# EAGLE board SHIELD_TEST_INPUT_v2 (EAGLE 9.6.2)
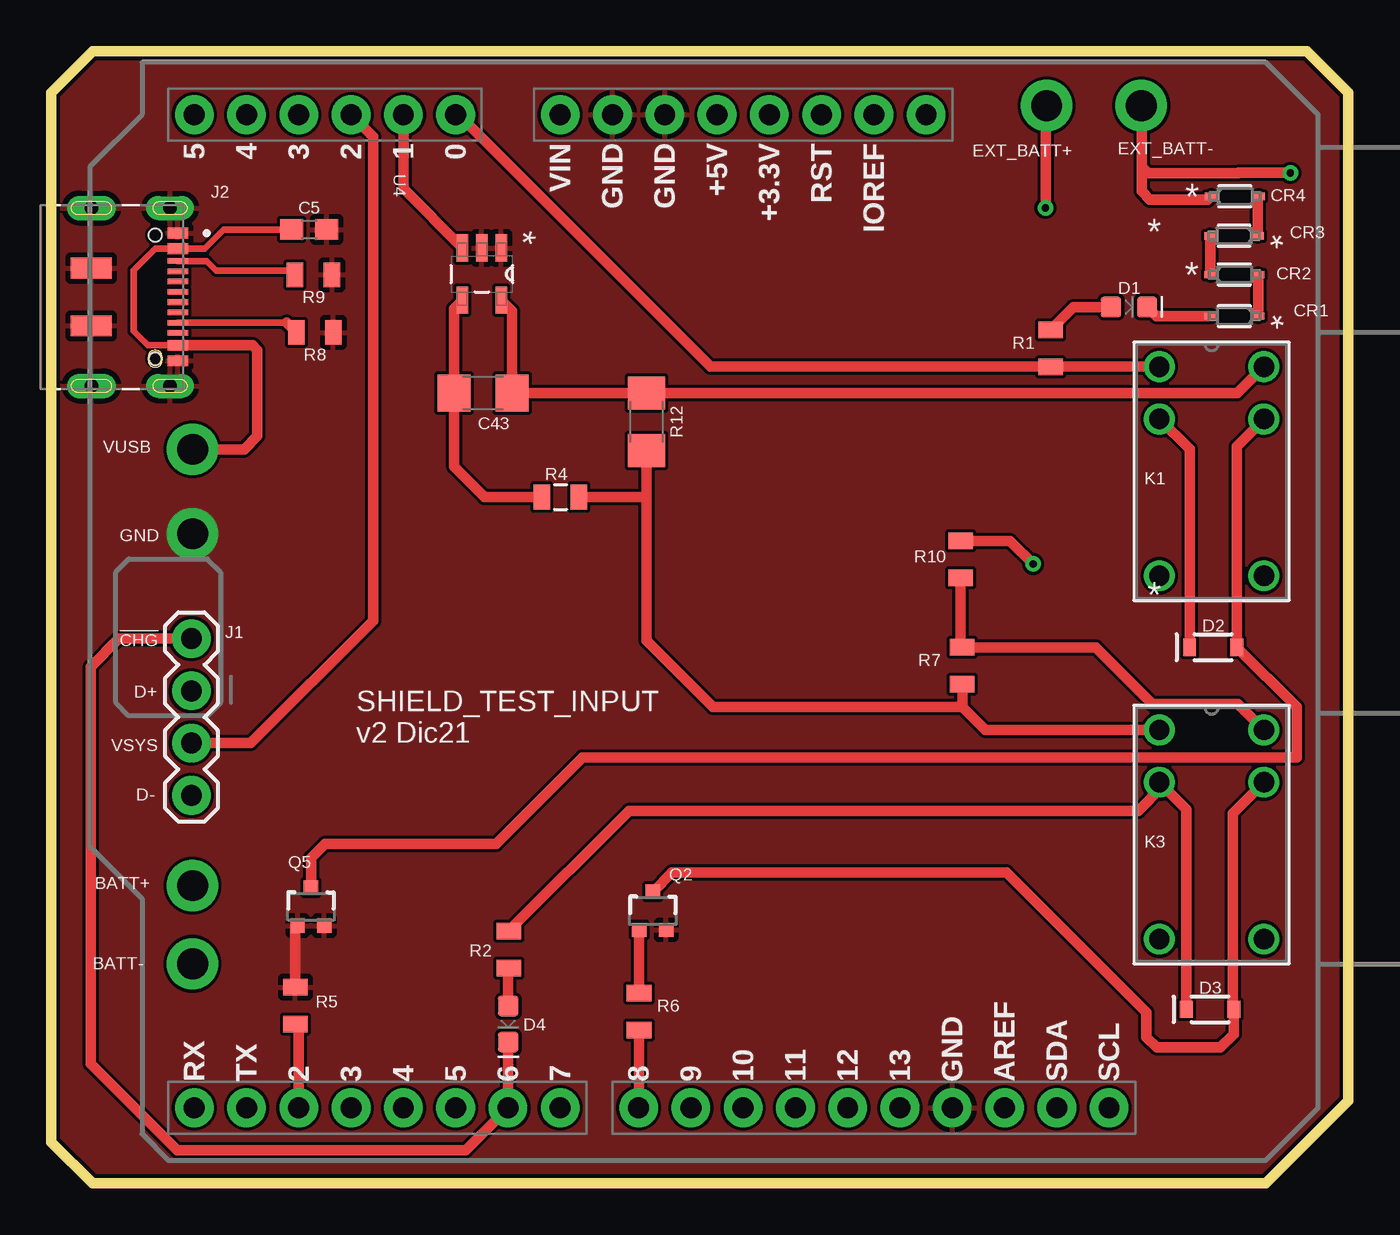
[diagram p0: board, top side]
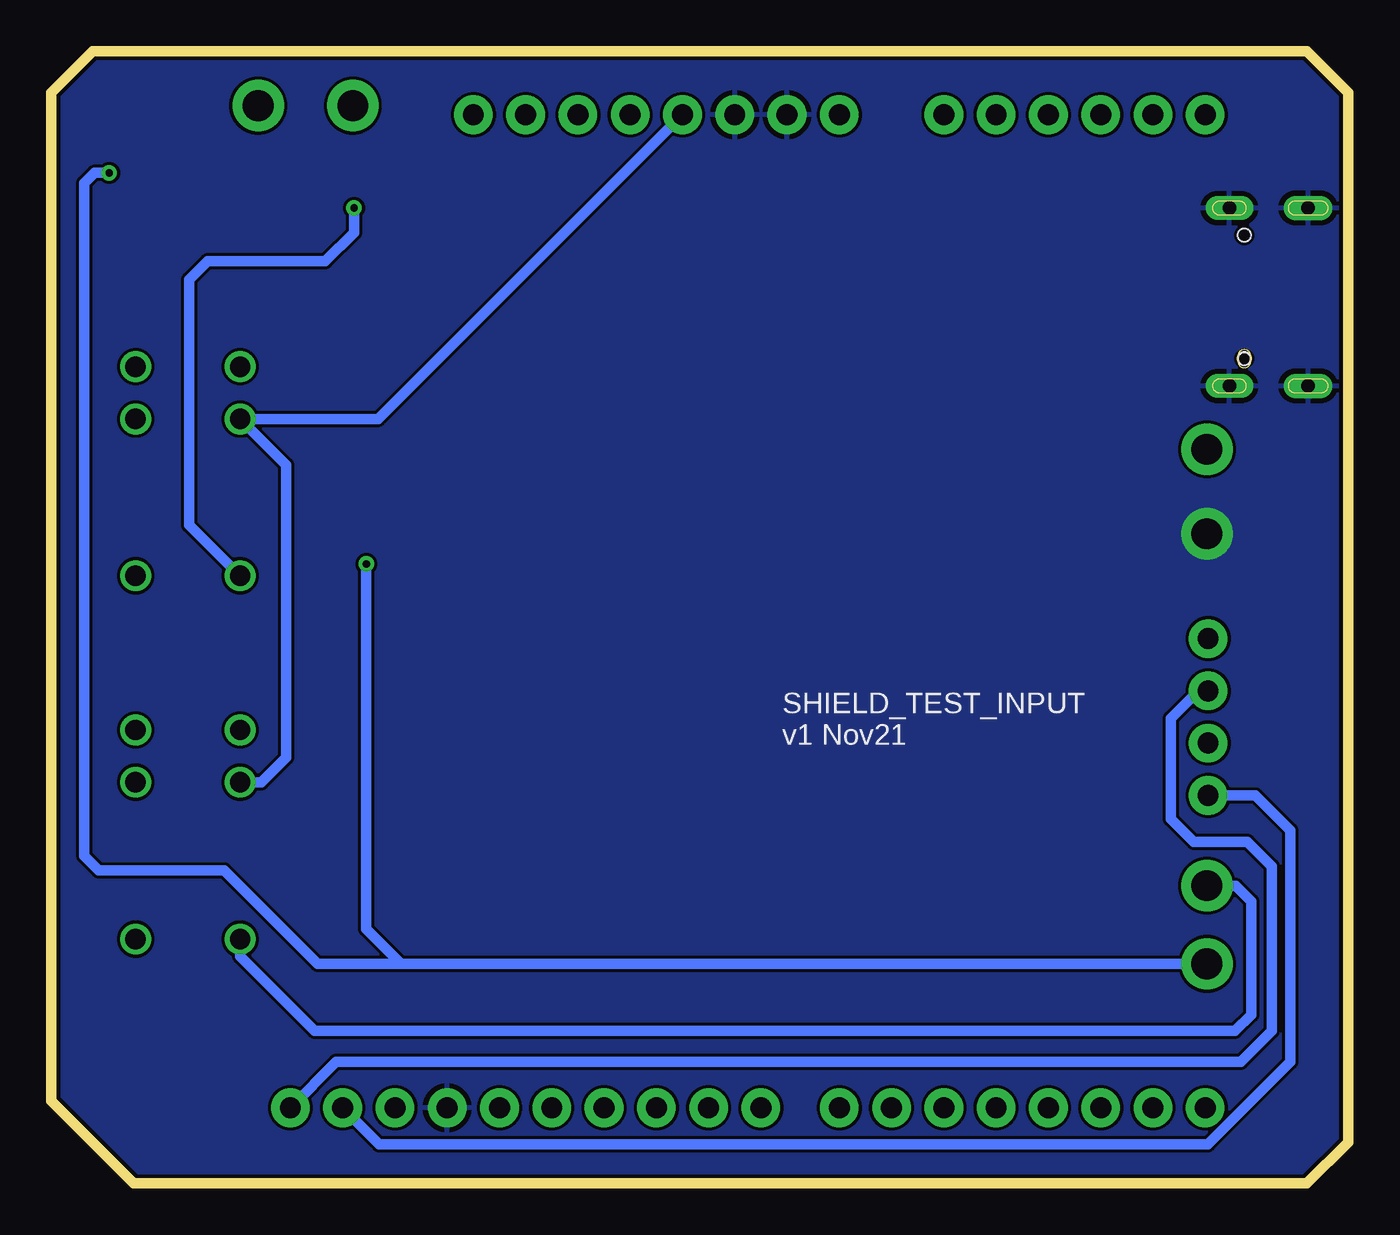
[diagram p1: board, bottom side, seen from below]

Size 63 x 55 mm. Coordinates in mm from the lower left corner, seen from the top.
Outline: 2,55 61,55 63,53 63,4 59,0 2,0 0,2 0,53 2,55
Copper layers (1*16): Top 0.035mm / dielectric 1.5mm / Bottom 0.035mm
Design rules "default *": minimum track width 6mil, minimum drill 0.35mm, track to track 6mil, track to pad 6mil, pad to pad 6mil, via to via 6mil, smd to smd 6mil, copper to edge 7mil, drill to drill 6mil, minimum pad ring 10mil, minimum via ring 8mil, stop-mask expansion 4mil, vias tented up to drill 0mil, thermal gap 10mil

## Footprints (pad centres in the part's own frame; a part is rotated, then mirrored left to right if it is on the bottom)
UNO_R3_SHIELD = drill 1.016 pad 1.88: 3.3V 24.13,-2.54; 5V 24.13,0; A0 24.13,12.7; A1 24.13,15.24; A2 24.13,17.78; A3 24.13,20.32; A4 24.13,22.86; A5 24.13,25.4; AREF -24.13,-13.97; D2 -24.13,20.32; D3 -24.13,17.78; D4 -24.13,15.24; D5 -24.13,12.7; D6 -24.13,10.16; D7 -24.13,7.62; D8 -24.13,3.81; D9 -24.13,1.27; D10 -24.13,-1.27; D11 -24.13,-3.81; D12 -24.13,-6.35; D13 -24.13,-8.89; GND@0 24.13,2.54; GND@1 24.13,5.08; GND@2 -24.13,-11.43; IOREF 24.13,-7.62; NC 24.13,-10.16; RES 24.13,-5.08; RX -24.13,25.4; SCL -24.13,-19.05; SDA -24.13,-16.51; TX -24.13,22.86; VIN 24.13,7.62
PAD.02X.02 = smd 0.508 x 0.508: P$1 0,0
0603 = smd 1.1 x 1: 1 -0.85,0; 2 0.85,0
1206 = smd 1.6 x 1.8: 1 -1.4,0; 2 1.4,0
SOD323F_DIO = smd 0.603 x 0.35: 1 -1.152,0; 2 1.152,0
LED-0603 = smd 1 x 1: A -0.877,0; C 0.877,0
SOD-323 = smd 0.63 x 0.83: A 1.15,0; C -1.15,0
1X04 = drill 1.016 pad 1.88: 1 0,0; 2 2.54,0; 3 5.08,0; 4 7.62,0
JAE_DX07S016JA1R1500 = smd 0.52 x 1: 1 -3.1,1.1; 2 -2.35,1.1; 11 2.35,1.1; 12 3.1,1.1 | smd 0.27 x 1: 3 -1.75,1.1; 4 -1.25,1.1; 5 -0.75,1.1; 6 -0.25,1.1; 7 0.25,1.1; 8 0.75,1.1; 9 1.25,1.1; 10 1.75,1.1 | smd 1 x 2: S1 -1.4,-3.1; S2 1.4,-3.1 | drill 0.65 long: S3 -4.32,0.725; S4 4.32,0.725 | drill 0.65 pad 1.2 long: S5 -4.32,-3.1; S6 4.32,-3.1 | hole 0.6: 3,0 | hole 0.63: 3,0; -3,0
RELAY_G5V-1_OMR = drill 0.991 pad 1.499: 1 -5.08,10.16; 2 -5.08,7.62; 5 -5.08,0; 6 0,0; 9 0,7.62; 10 0,10.16
SOT323 = smd 0.7 x 0.7: 1 -0.65,-0.925; 2 0.65,-0.925; 3 0,0.925
0805 = smd 0.8 x 1.2: 1 -0.9,0; 2 0.9,0
SOT95P280X145-5N = smd 1.321 x 0.559: 1 -1.27,0.94; 2 -1.27,0; 3 -1.27,-0.94; 4 1.27,-0.94; 5 1.27,0.94

## Placement (x,y rotation side)
B1  ARDUINO_UNO_R3_SHIELDBASIC  [UNO_R3_SHIELD]  32.34,27.8 90 top
BATT+  TEST-POINT2  [PAD.02X.02]  48.32,52.36 0 top
BATT-  TEST-POINT2  [PAD.02X.02]  52.98,52.36 0 top
C5  0.1uF  [0603]  12.52,46.35 0 top
C43  10uF  [1206]  20.97,38.39 180 top
CR1  1N4148WSF-7  [SOD323F_DIO]  57.48,42.14 180 top
CR2  1N4148WSF-7  [SOD323F_DIO]  57.48,44.16 0 top
CR3  1N4148WSF-7  [SOD323F_DIO]  57.46,46.04 180 top
CR4  1N4148WSF-7  [SOD323F_DIO]  57.5,47.96 0 top
D1  [LED-0603]  52.36,42.58 0 top
D2  250mA/100V  [SOD-323]  56.45,26.05 0 top
D3  250mA/100V  [SOD-323]  56.3,8.45 0 top
D4  [LED-0603]  22.19,7.74 270 top
J1  [1X04]  6.8,18.85 90 top
J2  DX07S016JA1R1500  [JAE_DX07S016JA1R1500]  5.04,43.07 270 top
K1  G5V-1-T90_DC5  [RELAY_G5V-1_OMR]  58.91,29.52 0 top
K3  G5V-1-T90_DC5  [RELAY_G5V-1_OMR]  58.91,11.87 0 top
Q2  2N7002PW  [SOT323]  29.22,13.24 0 top
Q5  2N7002PW  [SOT323]  12.61,13.44 0 top
R1  100  [0805]  48.55,40.58 90 top
R2  1k5  [0805]  22.22,11.36 90 top
R4  10K  [0805]  24.73,33.35 0 top
R5  330  [0805]  11.85,8.63 270 top
R6  330  [0805]  28.55,8.34 270 top
R7  10k  [0805]  44.25,25.15 270 top
R8  5k1  [0805]  12.79,41.35 180 top
R9  5k1  [0805]  12.73,44.15 180 top
R10  10k  [0805]  44.17,30.32 90 top
R12  0.010  [1206]  28.91,37 270 top
U4  MAX9938FEUK+T  [SOT95P280X145-5N]  20.91,44.18 270 top

## Library data of the parts
B1 = SparkFun-Boards
BATT+ BATT- = SparkFun-Connectors
C5 = SparkFun-Capacitors; PROD_ID: CAP-00810
C43 = SparkFun-Passives
CR1-CR4 = 1n4148; COPYRIGHT: Copyright (C) 2021 Ultra Librarian. All rights reserved.; DIGI-KEY_PART_NUMBER_1: 1N4148WSF-7DI-ND; DIGI-KEY_PART_NUMBER_2: 1N4148WSF-7DICT-ND; DIGI-KEY_PART_NUMBER_3: 1N4148WSF-7DIDKR-ND; DIGI-KEY_PART_NUMBER_4: 1N4148WSF-7DITR-ND; MANUFACTURER_PART_NUMBER: 1N4148WSF-7; MFR_NAME: Diodes Inc
D1 D4 = SparkFun-LED
D2 D3 = SparkFun-DiscreteSemi; PROD_ID: DIO-09646
J1 = SparkFun-Connectors; PROD_ID: CONN-09696
J2 = DX07S016JA1R1500; DESCRIPTION: USB-C (USB TYPE-C) USB 2.0 Receptacle Connector 24 (16+8 Dummy) Position Surface Mount, Right Angle; Through Hole; DIGI-KEY_PART_NUMBER: 670-DX07S016JA1R1500CT-ND; MF: JAE Electronics; MP: DX07S016JA1R1500; PACKAGE: None; PURCHASE-URL: https://pricing.snapeda.com/search/part/DX07S016JA1R1500/?ref=eda
K1 K3 = Rele; COPYRIGHT: Copyright (C) 2021 Ultra Librarian. All rights reserved.; DIGI-KEY_PART_NUMBER_1: Z6370-ND; MANUFACTURER_PART_NUMBER: G5V-1-T90 DC5; MFR_NAME: Omron
Q2 Q5 = SparkFun-DiscreteSemi; PROD_ID: TRANS-11151
R1 R2 R5-R10 R12 = SparkFun-Resistors
R4 = SparkFun
U4 = MAX9938; DESCRIPTION: Precision Current-Sense Amplifier; MPN: MAX9938FEUK+T; OC_FARNELL: -; OC_NEWARK: 01N6733; PACKAGE: SOT-23-5; SUPPLIER: Maxim

## Nets
!CHG: B1.D6 D4.C J1.4
BATT+: K3.5
BATT-: BATT-.P$1 CR4.1 R10.2
CC1: J2.3 R9.2
CC2: J2.9 R8.2
CUT_OFF: B1.D4
D+: B1.SDA J1.1
D-: B1.SCL J1.3
EXT_BATT+: BATT+.P$1 K1.5
EXT_BATT+1: K3.1 R4.2 R7.2 R12.2
GND: B1.GND@0 B1.GND@1 B1.GND@2 C5.2 J2.1 J2.12 J2.S1 J2.S2 J2.S3 J2.S4 J2.S5 J2.S6 Q2.2 Q5.1 Q5.2 R5.1 R8.1 R9.1 U4.1 U4.2
ISENSE: B1.A1 U4.3
LOW_OUTPUT: B1.D8 R6.2
N$1: CR1.2 D1.C
N$2: CR1.1 CR2.2
N$3: D1.A R1.2
N$4: CR2.1 CR3.2
N$5: D4.A R2.1
N$6: CR3.1 CR4.2
N$7: D3.A K3.9 Q2.3
N$8: Q2.1 R6.1
N$10: C43.2 R4.1 U4.4
N$12: D2.A K1.9 Q5.3
N&17: B1.A0 K1.1 R1.1
SWITCH: B1.D2 R5.2
VCC: B1.5V D2.C D3.C K1.2 K3.2 R2.2
VO_TPS: C43.1 K1.10 R12.1 U4.5
VO_TPS1: K3.10 R7.1 R10.1
VSYS: B1.A2 J1.2
VUSB: C5.1 J2.2 J2.11

## Tracks (layer width: path | path; a pad name or v marks a point on that pad's centre or on a via)
!CHG
  Top 0.508: D4.C B1.D6 20.11,1.6 6.1,1.6 1.9,5.8 1.9,25.1 3.27,26.47 J1.4
BATT+  (via drill 1.5 pad 2.5)
  Bottom 0.508: v6.86,14.47 5.46,14.47 4.7,13.7 4.7,8.2 5.5,7.4 50.2,7.4 53.83,11.03 K3.5
BATT-  (via drill 0.35, 1.5 pad 2.5)
  Top 0.508: v60.2,49.1 57.67,49.1 57.67,49.09 53.29,49.09 52.98,49.4 | 52.98,49.4 52.98,48.2 53.38,47.8 56.19,47.8 CR4.1 | 52.98,49.4 BATT-.P$1 v52.95,52.36 | R10.2 46.58,31.22 v47.7,30.1
  Bottom 0.508: v6.86,10.66 46,10.66 | 46,10.66 50.06,10.66 54.6,15.2 60.7,15.2 61.4,15.9 61.4,48.6 60.9,49.1 v60.2,49.1 | v47.7,30.1 47.7,12.37 46,10.66
CC1
  Top 0.305: R9.2 11.63,44.35 8.01,44.35 7.54,44.82 J2.3
CC2
  Top 0.305: J2.9 11.42,41.82
  Top 0.508: 11.42,41.82 R8.2
D+
  Bottom 0.508: B1.SDA 47.08,1.9 6.81,1.9 2.8,5.91 2.8,17.15 4.5,18.85 J1.1
D-
  Bottom 0.508: B1.SCL 49.16,5.9 5.2,5.9 3.7,7.4 3.7,15.4 4.9,16.6 7.5,16.6 8.6,17.7 8.6,22.6 7.27,23.93 J1.3
EXT_BATT+  (via drill 0.35, 1.5 pad 2.5)
  Top 0.508: v48.3,47.4 48.32,47.42 BATT+.P$1 v48.36,52.36
  Bottom 0.508: K1.5 56.3,31.99 56.3,43.9 55.4,44.8 49.7,44.8 48.3,46.2 v48.3,47.4
EXT_BATT+1
  Top 0.508: R4.2 28.75,33.35 28.91,33.51 R12.2 28.91,26.39 32.15,23.15 44.25,23.15 | R7.2 44.25,23.15 | K3.1 45.37,22.03 44.25,23.15
GND  (via drill 1.5 pad 2.5)
  Top 0.508: R5.1 11.85,12.41 Q5.1
  other vias: 6.86,31.56
  pour Top: -2.3,57 75.1,57 75.1,-1 -1,-1 -2.3,0.3
  pour Bottom: -2.2,57 75.2,57 75.2,-1 -1,-1 -2.2,0.2
ISENSE
  Top 0.508: U4.3 17.1,48.32 B1.A1
LOW_OUTPUT
  Top 0.508: R6.2 28.55,3.69 B1.D8
N$1
  Top 0.508: D1.C 53.68,42.14 CR1.2
N$2
  Top 0.508: CR1.1 CR2.2
N$3
  Top 0.508: R1.2 49.65,42.58 D1.A
N$4
  Top 0.508: CR2.1 56.31,44.18 CR3.2
N$5
  Top 0.508: D4.A 22.19,10.43 R2.1
N$6
  Top 0.508: CR3.1 58.61,47.92 CR4.2
N$7
  Top 0.508: K3.9 57.4,17.98 57.4,8.5 D3.A 57.45,7.25 56.8,6.6 53.7,6.6 53.2,7.1 53.2,8.3 46.4,15.1 30.16,15.1 Q2.3
N$8
  Top 0.508: R6.1 28.55,12.3 Q2.1
N$10
  Top 0.508: U4.4 19.57,42.51 C43.2 19.57,34.83 21.05,33.35 R4.1
N$12
  Top 0.508: K1.9 58.91,37.11 57.6,35.8 D2.A 60.5,23.15 60.5,20.7 25.8,20.7 21.6,16.5 13.3,16.5 12.61,15.81 Q5.3
N&17
  Top 0.508: B1.A0 19.77,51.93 32.02,39.68 R1.1 K1.1
SWITCH
  Top 0.508: R5.2 12.02,7.56 B1.D2
VCC
  Top 0.508: K3.2 54.01,19.31 | 54.01,19.31 55.15,18.17 D3.C | K1.2 55.3,35.67 D2.C | R2.2 28.06,18.1 52.8,18.1 54.01,19.31
  Bottom 0.508: K3.2 52.81,19.49 51.6,20.7 51.6,34.91 K1.2 47.13,37.14 B1.5V
VO_TPS
  Top 0.508: U4.5 22.37,42.39 C43.1 R12.1 57.63,38.4 K1.10
VO_TPS1
  Top 0.508: K3.10 57.64,23.3 53.5,23.3 50.75,26.05 R7.1 44.17,26 R10.1
VSYS
  Top 0.508: B1.A2 15.63,50.86 15.63,27.33 9.69,21.39 J1.2
VUSB  (via drill 1.5 pad 2.5)
  Top 0.305: C5.1 8.37,46.35 7.44,45.42 J2.2 5.04,45.42 4,44.38 4,41.4 4.68,40.72 J2.11
  Top 0.508: v6.86,35.66 9.36,35.66 10,36.3 10,40.5 9.78,40.72 J2.11

## Text on the board
tNames: EXT_BATT+ | EXT_BATT- | VUSB | GND | !CHG | D+ | VSYS | SHIELD_TEST_INPUT / v2 Dic21 | D- | BATT+ | BATT-
bNames: SHIELD_TEST_INPUT / v1 Nov21